# Altium PCB 滑板车模块-201119.PcbDoc
Units mm, origin at the board's own origin, x right, y up, seen from the top; angles counter-clockwise.
Board outline 16 x 13 mm, 2 copper layers (Top Layer, Bottom Layer); 21 components, 26 nets, 89 pads, 31 vias.
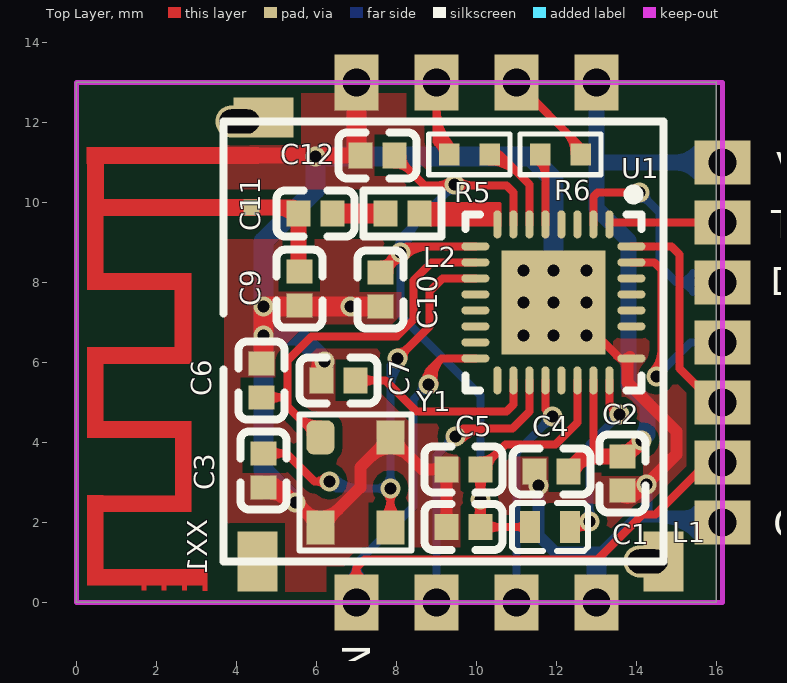
[diagram p0: Top Layer view]
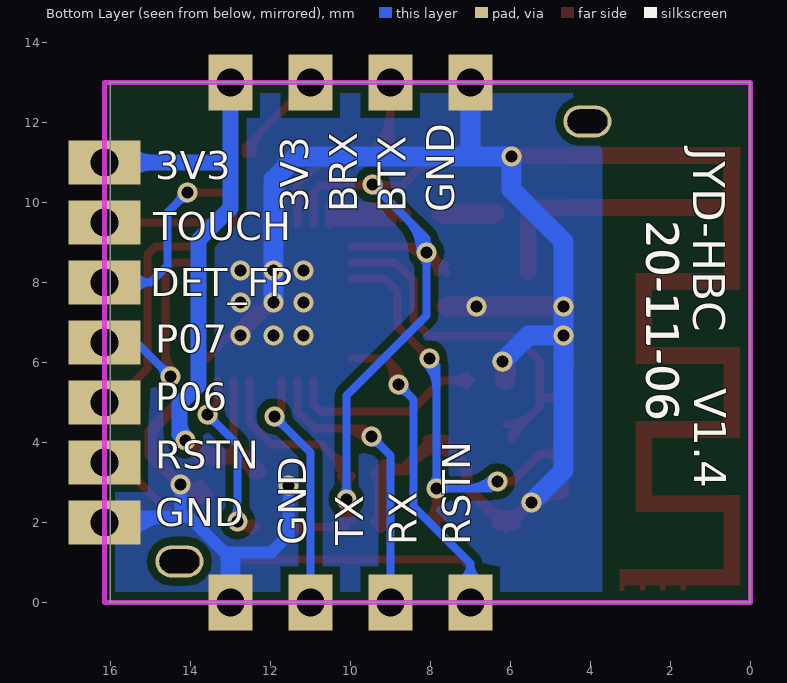
[diagram p1: Bottom Layer view, seen from below]
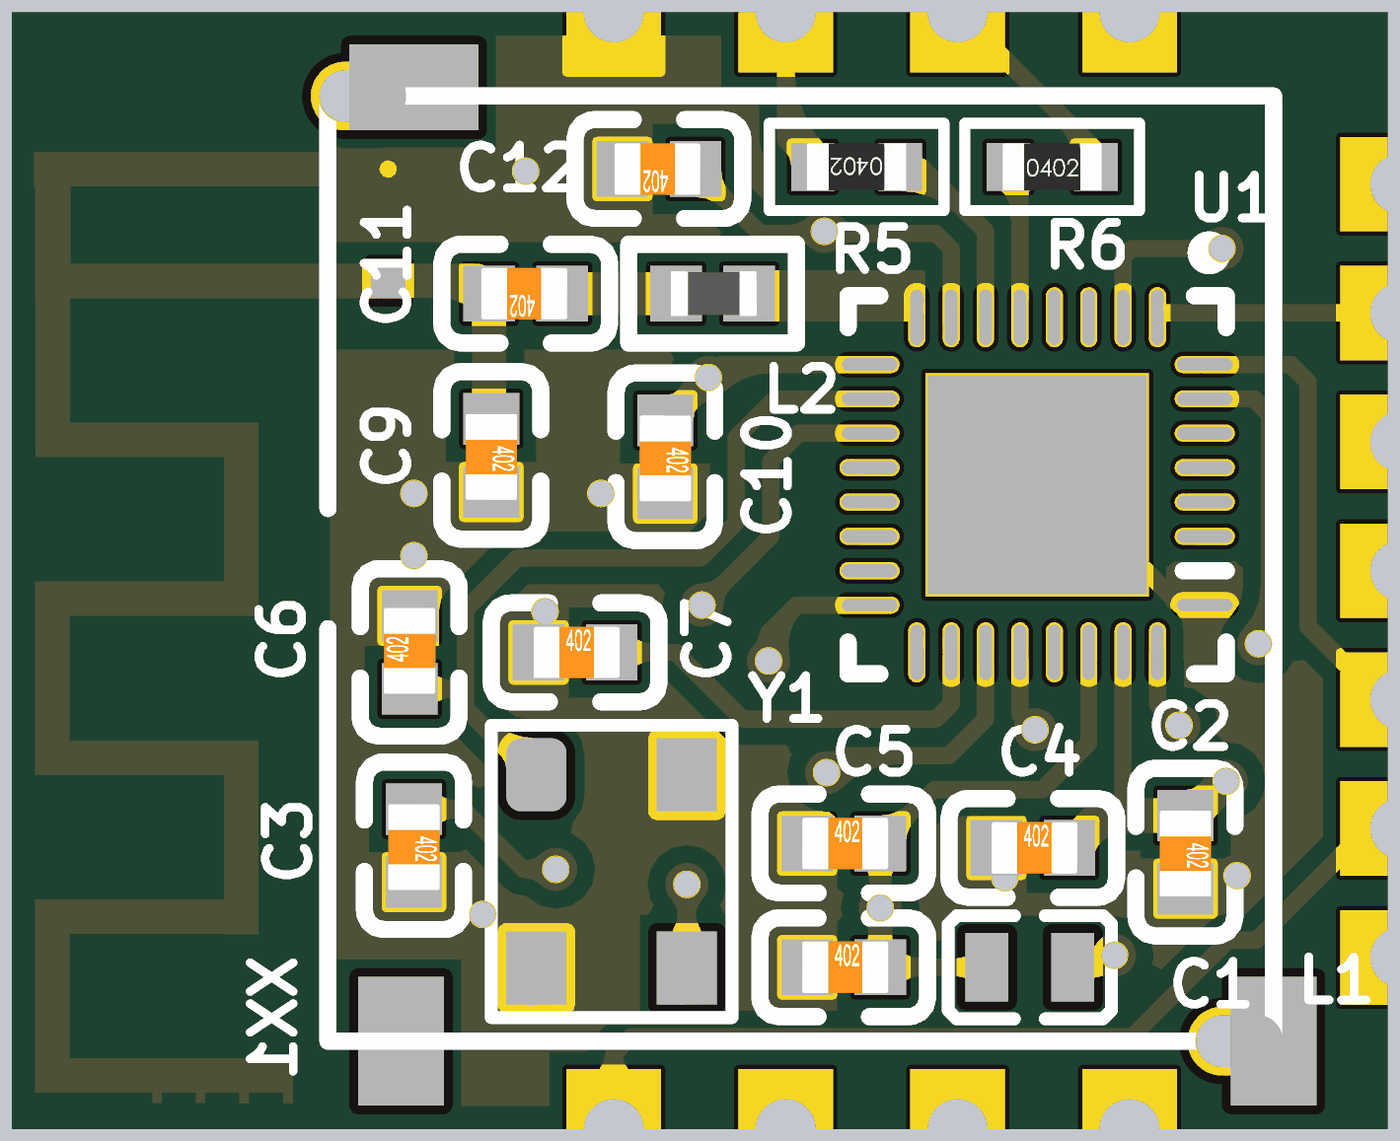
[diagram p2: 3D render of the assembled board from above, using the file's embedded part models]

## Layer stack, top to bottom
Top Layer: signal copper 0.0356
Dielectric: dielectric 0.32, FR-4, Dk 4.8
Bottom Layer: signal copper 0.0356

## Board outline
0,13 16,13 16,0 0,0

## Design rules (kind name [scope] priority, off if disabled: settings)
Clearance Clearance_2 [All] p1 off: gap=0.1
Clearance Clearance_1 [(IsWire)or(IsThruPin)or(IsFill)or(InPolygon) vs (InPolygon)] p2: gap=0
Clearance [All] p3 off: gap=0.2
ComponentClearance [All] p1: gap=0 collisioncheckmode=3 verticalgap=0 showdistances=FALSE
DiffPairsRouting [All] p1: maxlimit=2.032 minlimit=0.152 mostfreqgap=0.2 maxuncoupledlength=12.7
FabricationTestpoint [(IsPad And (OnTopLayer Or OnBottomLayer))] p1: side=3 testpointundercomponent=TRUE minsize=1.016 maxsize=2.54 preferedsize=1.524 minholesize=0 maxholesize=1.016 preferedholesize=0.813 testpointgrid=0.025 allowsidetop=TRUE allowsidebottom=TRUE usegrid=TRUE gridtolerance=0
HoleToHoleClearance [All] p1: gap=0 allowstackedmicrovias=TRUE
MinimumSolderMaskSliver [All] p1: minsoldermaskwidth=0
PolygonConnect PolygonConnect_1 [isvia] p1: connectstyle=Direct reliefconductorwidth=0.254 reliefentries=4 polygonreliefangle="90 Angle" airgapwidth=0.254
PolygonConnect [All] p2: connectstyle=Direct reliefconductorwidth=0.305 reliefentries=4 polygonreliefangle="90 Angle" airgapwidth=0.254
RoutingVias [All] p1: holewidth=0.3 width=0.5 viastyle="Through Hole" minholewidth=0.3 minwidth=0.5 maxholewidth=0.3 maxwidth=0.5
ShortCircuit [All] p1: allowed=TRUE
SilkToSilkClearance [All] p1: silktosilkclearance=0
SilkToSolderMaskClearance [IsPad] p1: minsilkscreentomaskgap=0 clearancetoexposedcopper=TRUE
SolderMaskExpansion [All] p1: expansion=0.102
Width [All] p1: maxlimit=2.032 minlimit=0.1 preferedwidth=0.2
20 further rules are at their usual default settings.

## Classes and differential pairs
component class "仪表-蓝牙-指纹 接线图": J2
component class 滑板车模块: C1 C2 C3 C4 C5 C6 C7 C9 C10 C11 C12 L1 L2 R5 R6 U1 XX1 Y1

## Components (designator, comment, footprint, x,y, rotation, side; value= is the part's Value field where it differs from the comment)
C1 "4.7uF/10V" LC-0402_C 9.675,1.885 r0 top
C2 "100nF" LC-0402_C 13.65,3.225 r270 top (schematic designator C17)
C3 "5.6pF" LC-0402_C 4.675,3.3 r270 top (schematic designator C12)
C4 "1uF/10V" LC-0402_C 11.875,3.275 r0 top (schematic designator C2)
C5 "1uF/6.3" LC-0402_C 9.675,3.325 r0 top (schematic designator C3)
C6 "5.6pF" LC-0402_C 4.625,5.55 r90 top (schematic designator C11)
C7 "100nF" LC-0402_C 6.55,5.55 r0 top
C9 "1.0pF" LC-0402_C 5.575,7.842 r270 top (schematic designator C8)
C10 "100nF" LC-0402_C 7.6,7.825 r270 top (schematic designator C9)
C11 "1pF" LC-0402_C 5.975,9.725 r180 top (schematic designator C6)
C12 "1uF/6.3V" LC-0402_C 7.525,11.175 r180 top (schematic designator C4)
J6 "7P" 7P-1.5MM 16.15,6.5 r270 bottom
L1 "2.2uH" L0402 11.84,1.885 r180 top
L2 "2nH" LC-0402_L 8.15,9.725 r0 top
P1 "Header 4" 4P-2.0MM 10,13 r180 top
P2 "Header 4" 4P-2.0MM 10,0 r180 top
R5 "20R" 0402R 9.825,11.2 r180 top
R6 "20R" 0402R 12.1,11.2 r0 top
U1 "BK3432" LC-VQFN-32_4x4x04P 11.925,7.5 r180 top
XX1 "TIANX" BT_NAMI_NO 4.375,9.875 r90 top
Y1 "16MHz" SMT-3225 6.975,3 r270 top

## Footprints (in the part's own frame and the unit in brackets; to place one, negate y for a bottom-side part, rotate by r counter-clockwise, add the part's x,y. Pads: shape width x height; smd on the part's side, far side on the other; paste and mask are expansions set on the pad)
4P-2.0MM [mm]
  rect 1.1x1.4 hole 0.7 mask+0.05: 1(-3,0) 2(-1,0) 3(1,0) 4(3,0)
7P-1.5MM [mm]
  rect 1.1x1.8 / inner rect 1.1x1.4 / far side rect 1.1x1.4 hole 0.7 mask+0.05: 1(-4.5,0) 2(-3,0) 3(-1.5,0) 4(0,0) 5(1.5,0) 6(3,0) 7(4.5,0)
0402R [mil]
  rect 20x22 smd mask+2: 1(-20,0) 2(20,0)
  silkscreen extent -40,-20 40,20, body extent -23,-11 23,11, height 16
BT_NAMI_NO [mm]
  rect 0.4x0.4 smd: 1(0,0)
  rect 0x0 smd: 2(1.3,0)
  Top Layer region: 1.5,-0.18 1.098,-0.18 1.098,4.116 1.5,4.116
  Top Layer region: 0.2,-0.197 -0.203,-0.197 -0.203,4.1 0.2,4.1
  Top Layer region: -2.05,3.703 -2.05,4.104 0.199,4.104 0.199,3.703
  Top Layer region: -1.651,1.512 -2.053,1.512 -2.053,4.101 -1.651,4.101
  Top Layer region: -0.208,3.695 -0.208,4.11 1.495,4.11 1.495,3.695
  Top Layer region: -3.899,1.51 -3.899,1.911 -1.65,1.911 -1.65,1.51
  Top Layer region: -3.5,1.512 -3.902,1.512 -3.902,4.101 -3.5,4.101
  Top Layer region: -5.751,3.704 -5.751,4.106 -3.502,4.106 -3.502,3.704
  Top Layer region: -7.609,1.506 -7.609,1.907 -5.359,1.907 -5.359,1.506
  Top Layer region: -5.35,1.51 -5.752,1.51 -5.752,4.103 -5.35,4.103
  Top Layer region: -7.202,1.51 -7.604,1.51 -7.604,4.106 -7.202,4.106
  Top Layer region: -9.45,3.704 -9.45,4.106 -7.201,4.106 -7.201,3.704
  Top Layer region: -9.048,1.106 -9.45,1.106 -9.45,4.108 -9.048,4.108
  Top Layer region: -9.574,1.732 -9.135,1.732 -9.135,1.619 -9.574,1.619
  Top Layer region: -9.573,2.239 -9.136,2.239 -9.136,2.126 -9.573,2.126
  Top Layer region: -9.571,2.745 -9.135,2.745 -9.135,2.632 -9.571,2.632
  Top Layer region: -9.578,1.22 -9.136,1.22 -9.136,1.107 -9.578,1.107
L0402 [mm]
  rect 0.5x0.8 smd: 1(-0.5,0) 2(0.5,0)
  silkscreen extent -0.95,-0.6 0.95,0.6
LC-0402_C [mm]
  rect 0.6x0.65 smd mask+0.051: 1(-0.425,0) 2(0.425,0)
  silkscreen extent -0.98,-0.58 0.97,0.58, body extent -0.48,-0.3 0.52,0.3, height 0.2
LC-0402_L [mm]
  rect 0.6x0.65 smd mask+0.051: 1(-0.425,0) 2(0.425,0)
  silkscreen extent -0.98,-0.58 0.97,0.58, body extent -0.51,-0.26 0.54,0.26, height 0.36
LC-VQFN-32_4x4x04P [mm]
  rect 2.6x2.6 smd paste-0.025 mask+0.051: 0(0,0)
  oval 0.2x0.7 smd paste-0.025 mask+0.051: 1(-1.4,-1.95) 2(-1,-1.95) 3(-0.6,-1.95) 4(-0.2,-1.95) 5(0.2,-1.95) 6(0.6,-1.95) 7(1,-1.95) 8(1.4,-1.95) 17(1.4,1.95) 18(1,1.95) 19(0.6,1.95) 20(0.2,1.95) 21(-0.2,1.95) 22(-0.6,1.95) 23(-1,1.95) 24(-1.4,1.95)
  oval 0.7x0.2 smd paste-0.025 mask+0.051: 9(1.95,-1.4) 10(1.95,-1) 11(1.95,-0.6) 12(1.95,-0.2) 13(1.95,0.2) 14(1.95,0.6) 15(1.95,1) 16(1.95,1.4) 25(-1.95,1.4) 27(-1.95,0.6) 28(-1.95,0.2) 29(-1.95,-0.2) 30(-1.95,-0.6) 31(-1.95,-1) 32(-1.95,-1.4)
  oval 0.7x0.2 on Top Overlay paste-0.025 mask+0.051: 26(-1.95,1)
  silkscreen extent -2.2,-2.82 2.2,2.2
SMT-3225 [mm]
  rrect50% 0.85x0.7 smd: 1(-1.125,-0.875)
  rect 0.85x0.7 smd: 2(1.125,-0.875) 3(1.125,0.875) 4(-1.125,0.875)
  silkscreen extent -1.7,-1.4 1.7,1.4

## Part data
C1 C3 C4 C5 C6 C7 C9 C10 C11 C12: library part CAP0603
C2: library part CAP-NP, "Capacitor, Ceramic"
L1 L2: "Power Inductor, 4.7uH, 0.7A, 260mR DCR"
P1 P2: "Header, 4-Pin"
R5 R6: library part Res1, "Resistor"
Y1: library part OSCILATOR_0

## Free pads (board coordinates)
  rect 1x1.5 smd: 0(4.525,1.025) 0(14.675,1.025)
  oval 1.2x0.8 hole 0.6 slot 1 at 0 deg: 1(4.075,12.025) 2(14.275,1.025)
  rect 1.5x1 smd: 1(4.675,12.125)

## Via types
v1: diameter 0.5, hole 0.3, Top Layer to Bottom Layer, tented both sides, 31 vias

## Nets (pads, with @x,y where several pads share a name; then routed paths per layer and width w, separated by ;. In a path a pad name is that pad's centre, name@x,y a point inside that pad or via, vN(x,y) a via of type N, cw(c..) or ccw(c..) an arc to the next point about the centre after c; other vN are vias at no path point)
3V3: 
BRX: 
DET_FP: 
GND: C1.1 C2.2 C3.2 C4.1 C5.1 C6.2 C7.1 C9.2 C10.2 C12.2 J6.7 P1.4 P2.1 U1.25 XX1.2 Y1.2 Y1.4 | length 72.2
  Top Layer w0.2: C7.1@6.034,5.753 ccw(c5.894,6.025) v1(6.2,6.025) 6.2,5.625 C7.1 ; v1@6.094,5.919 cw(c5.838,5.663) 6.2,5.663 cw(c6.562,5.663) v1@6.306,5.919 ; v1@6.2,5.877 ccw(c6.427,5.877) C7.1@6.266,5.716 ; v1(11.925,7.5) 12.075,7.35 12.341,7.35 13.591,6.1 13.775,6.1 U1.25
  Top Layer w0.3: C3.2 5.1,2.875 Y1.2 7.1,2.875 7.1,3.375 Y1.4 8.65,3.325 C5.1 C1.1 ; C3.2@4.7,2.725 cw(c4.7,1.397) v1@5.639,2.336 ; C3.2@4.7,3.025 cw(c4.7,2.421) 5.127,2.848 ; C3.2@4.806,2.769 cw(c5.062,2.513) 5.062,2.875 cw(c5.062,3.237) C3.2@4.806,2.981 ; 5.11,2.641 ccw(c5.334,3.028) v1@5.449,2.597 ; v1@5.572,2.526 ccw(c5.993,2.639) Y1.2@5.775,2.261 ; v1@5.631,2.344 ccw(c6.1,2.814) 6.1,2.15 ccw(c6.1,2.814) 6.569,2.344 ; Y1.2@5.812,2.163 cw(c5.598,1.95) Y1.2@5.9,1.95 ; Y1.2@6.3,1.95 cw(c6.602,1.95) Y1.2@6.388,2.163 ; 7.381,3.656 cw(c7.85,3.186) 7.85,3.85 cw(c7.85,3.186) 8.319,3.656 ; Y1.4@7.562,3.837 ccw(c7.348,4.05) Y1.4@7.65,4.05 ; Y1.4@8.05,4.05 ccw(c8.352,4.05) Y1.4@8.138,3.837 ; C1.1@9.144,2.016 ccw(c8.888,2.272) 9.25,2.272 ccw(c9.612,2.272) C1.1@9.356,2.016 ; C5.1@9.144,3.194 cw(c8.888,2.938) 9.25,2.938 cw(c9.612,2.938) C5.1@9.356,3.194 ; C5.1@9.144,3.219 ccw(c8.888,2.963) 8.888,3.325 ccw(c8.888,3.687) C5.1@9.144,3.431 ; v1@12.075,7.35 v1(12.75,6.675) ; C2.2@13.583,2.681 ccw(c13.781,2.937) 14.009,2.709 ; C2.2@13.767,2.919 ccw(c13.991,3.21) v1(14.251,2.95) ; 13.775,5.979 cw(c13.996,5.979) U1.25@13.84,6.135 ; U1.25@13.775,6.1 13.775,5.5 15,4.275 15,3.699 v1(14.251,2.95) ; C2.2@13.781,2.694 cw(c14.037,2.438) 14.037,2.8 cw(c14.037,3.162) C2.2@13.781,2.906 ; C2.2@13.831,2.745 ccw(c13.69,3.274) v1@14.164,3 ; C2.2@13.887,2.76 ccw(c13.779,3.163) v1@14.16,2.991 ; C2.2@13.901,2.646 ccw(c13.629,3.117) v1@14.154,2.976 ; C2.2@13.965,2.683 ccw(c13.775,3.012) v1@14.152,2.963 ; v1@14.18,3.021 cw(c13.65,3.546) C2.2 14.101,2.8 v1(14.251,2.95)
  Top Layer w0.4: XX1.2 C12.2
  Top Layer w0.5: C6.2 4.675,6.025 v1(4.675,6.675) v1(4.675,7.4) 6.15,7.4 C10.2 ; C7.1 6.125,5.95 v1(6.2,6.025) ccw(c6.431,5.794) C7.1@6.166,5.604 ; 7,11.562 ccw(c7.462,11.562) C12.2@7.135,11.235 ; P1.4 7,11.275 C12.2
  Bottom Layer w0.3: v1(11.55,2.925) 11.55,1.675 11.975,1.25 13.15,1.25 14.05,2.15 14.275,2.15 ; v1(14.251,2.95) 14.251,2.174 14.275,2.15 ; 14.472,2.15 cw(c14.472,0.672) J6.7@15.517,1.717 ; J6.7@15.517,2.283 cw(c15.196,2.604) 15.196,2.15 cw(c15.196,1.396) J6.7@15.729,1.929 ; J6.7 16,2.15 14.275,2.15
  Bottom Layer w0.5: v1(5.475,2.5) 4.675,3.3 v1(4.675,6.675) ; v1(6.2,6.025) 5.55,6.675 v1(4.675,6.675) ; 7,11.225 P1.4 ; v1(11.925,7.5) 11.925,10.575 11.35,11.15 v1(5.975,11.15) 5.975,10.325 4.675,9.025 v1(4.675,6.675) ; P2.1 13,1.1
  other v1: 11.175,6.675 11.925,6.675 6.85,7.4 11.175,7.5 12.75,7.5 11.175,8.3 11.925,8.3 12.75,8.3
M3V3: C2.1 C4.2 J6.1 P1.1 U1.23 | length 20.1
  Top Layer w0.2: 12.925,3.65 U1.23
  Top Layer w0.4: C4.2 12.675,3.65 12.925,3.65 ; C4.2@12.395,3.268 cw(c12.925,3.091) 12.925,3.65 ; C2.1@13.675,3.75 ccw(c13.675,4.112) C2.1@13.931,3.856 ; v1(14.125,4.05) 13.725,3.65 C2.1 12.925,3.65 ; C2.1@13.908,3.842 ccw(c13.726,4.157) 14.077,4.063 cw(c13.726,4.157) C2.1@13.908,3.842
  Bottom Layer w0.4: 13,11 J6.1 ; P1.1 13,9.85 13.8,9.05 13.8,5.425 14.275,4.95 14.275,4.2 v1(14.125,4.05) ; v1@14.09,4.085 ccw(c13.642,4.533) 14.275,4.533 ; J6.1@15.553,10.753 ccw(c14.955,10.155) 14.955,11 ccw(c14.955,11.845) J6.1@15.553,11.247
NetC3_1: C3.1 U1.11 Y1.3 | length 17.9
  Top Layer w0.2: C3.1 5.25,3.725 5.95,3.025 v1(6.325,3.025) ; C3.1@4.841,3.584 cw(c5.183,3.242) 5.183,3.725 cw(c5.183,4.208) C3.1@4.841,3.866 ; v1@6.219,2.919 ccw(c5.963,2.663) 5.963,3.025 ccw(c5.963,3.387) v1@6.219,3.131 ; Y1.3@7.673,2.127 ccw(c7.246,2.554) 7.85,2.554 ccw(c8.454,2.554) Y1.3@8.027,2.127 ; v1@7.744,2.744 cw(c7.488,2.488) 7.85,2.488 cw(c8.212,2.488) v1@7.956,2.744 ; Y1.3 v1(7.85,2.85) ; v1(8.025,6.1) 8.825,6.9 8.825,7.775 9.15,8.1 U1.11 ; v1@8.025,6.25 ccw(c8.025,6.612) 8.281,6.356 ccw(c8.537,6.1) v1@8.175,6.1
  Bottom Layer w0.2: v1@6.29,2.99 ccw(c6.627,3.327) 6.627,2.85 ; v1(6.325,3.025) 6.5,2.85 v1(7.85,2.85) 7.85,5.925 v1(8.025,6.1) ; v1@6.431,3.131 ccw(c7.11,3.81) 7.11,2.85 ; v1@7.744,2.744 ccw(c7.488,2.488) 7.488,2.85 ccw(c7.488,3.212) 7.744,2.956 ccw(c7.488,3.212) 7.85,3.212 ccw(c8.212,3.212) v1@7.956,2.956 ; 7.85,5.315 cw(c8.81,5.315) v1@8.131,5.994 ; 7.85,5.798 cw(c8.327,5.798) v1@7.99,6.135
NetC6_1: C6.1 U1.10 Y1.1 | length 10.9
  Top Layer w0.2: C6.1 5.275,5.125 ; C6.1@4.791,4.984 cw(c5.133,4.642) 5.133,5.125 cw(c5.133,5.608) C6.1@4.791,5.266 ; 5.46,4.715 ccw(c6.1,5.355) Y1.1@6.1,4.45 ; Y1.1@5.762,4.413 cw(c5.548,4.2) Y1.1@5.85,4.2 ; Y1.1@5.95,4.1 5.95,4.225 5.275,4.9 5.275,5.125 ; U1.10 8.875,8.5 8.425,8.05 8.425,7.066 8.009,6.65 5.875,6.65 5.275,6.05 5.275,5.125
NetC7_2: C7.2 U1.18 | length 5.7
  Top Layer w0.2: C7.2 7.725,5.55 8.5,4.775 10.75,4.775 10.925,4.95 U1.18 ; C7.2@7.116,5.409 cw(c7.458,5.067) 7.458,5.55 cw(c7.458,6.033) C7.2@7.116,5.691
NetC9_1: C9.1 C11.2 XX1.1 | length 3.2
  Top Layer w0.4: XX1.1 5.4,9.875 C11.2 5.55,8.275 C9.1@5.575,8.25 ; 5.007,9.875 cw(c5.007,9.207) C11.2@5.479,9.679
NetC11_1: C11.1 L2.1 | length 1.3
  Top Layer w0.5: C11.1 L2.1
NetL1_1: L1.1 U1.24 | length 7.1
  Top Layer w0.2: L1.1@12.45,1.783 cw(c12.685,1.564) v1@12.685,1.885 ; L1.1@12.45,1.987 ccw(c12.685,2.207) v1@12.685,1.885 ; v1@12.693,2.096 cw(c12.34,2.285) L1.1 v1@12.685,1.885 ; v1(12.825,2.025) v1@12.685,1.885 ; U1.24 13.325,4.95 ; v1@13.425,4.703 ccw(c13.083,4.708) 13.325,4.95 ; v1@13.572,4.85 cw(c13.567,5.192) 13.325,4.95 ; v1(13.575,4.7) 13.325,4.95
  Bottom Layer w0.2: v1@12.719,2.131 ccw(c12.463,2.387) 12.825,2.387 ccw(c13.187,2.387) v1@12.931,2.131 ; v1(12.825,2.025) 12.825,3.95 v1(13.575,4.7) ; v1@13.425,4.7 cw(c13.063,4.7) 13.319,4.444 cw(c13.575,4.188) v1@13.575,4.55
NetL2_2: L2.2 U1.8 | length 3.4
  Top Layer w0.2: L2.2 8.675,9.825 10.45,9.825 10.525,9.75 U1.8 ; L2.2@8.716,9.609 cw(c9.239,9.086) 9.239,9.825 ; L2.2@8.716,9.891 ccw(c8.877,10.052) 8.877,9.825 ; 10.223,9.825 cw(c10.223,9.398) U1.8@10.525,9.7
P03: U1.3
P04: J6.3 U1.2 | length 7.8
  Top Layer w0.2: U1.2 12.925,10.15 13.025,10.25 v1(14.075,10.25) ; v1@13.969,10.144 ccw(c13.713,9.888) 13.713,10.25 ccw(c13.713,10.612) v1@13.969,10.356
  Bottom Layer w0.2: v1@14.075,10.1 cw(c14.075,9.738) 14.331,9.994 cw(c14.587,10.25) v1@14.225,10.25 ; v1(14.075,10.25) 14.575,9.75 14.575,8.425 15,8 ; J6.3@15.415,7.766 ccw(c15,7.514) 15,8 ; J6.3@15.415,8.234 cw(c15,8.486) 15,8 ; J6.3 15,8
P05/TOUCH: J6.2 U1.1 | length 3
  Top Layer w0.2: 13.446,9.5 ccw(c13.446,9.329) U1.1 13.375,9.5 J6.2
P06: J6.5 U1.32 | length 5.6
  Top Layer w0.2: U1.32 14.875,8.9 15.075,8.7 15.075,5.85 15.925,5 J6.5
P07: J6.4 U1.31 | length 6.7
  Top Layer w0.2: U1.31 14.45,8.5 14.625,8.325 14.625,5.775 v1(14.5,5.65) ; v1@14.394,5.756 ccw(c13.836,6.314) 14.625,6.314
  Bottom Layer w0.2: v1(14.5,5.65) 15.35,6.5 J6.4 ; v1@14.5,5.8 ccw(c14.5,6.162) 14.756,5.906 ccw(c15.012,5.65) v1@14.65,5.65
RSTN: J6.6 P2.4 U1.16 | length 23
  Top Layer w0.2: P2.4@6.8,0.553 ccw(c6.641,0.875) 7,0.875 ; P2.4 7,0.875 ; P2.4@7.2,0.553 cw(c7.359,0.875) 7,0.875 ; v1@8.703,5.564 ccw(c8.523,5.775) 8.8,5.775 ; v1@8.751,5.439 cw(c9.177,5.535) 8.868,5.843 ; v1(8.8,5.45) 8.8,5.775 ; v1@8.897,5.564 cw(c9.077,5.775) 8.8,5.775 ; v1@8.946,5.483 cw(c9.596,5.629) 9.125,6.1 ; U1.16 9.125,6.1 ; J6.6 15.775,3.5 14.475,2.2 14.15,2.2 13.025,1.075 7.2,1.075 7,0.875 ; 8.8,5.775 9.125,6.1
  Bottom Layer w0.2: P2.4@6.756,0.528 ccw(c6.469,0.975) 7,0.975 ; P2.4 7,0.975 ; P2.4@7.244,0.528 cw(c7.531,0.975) 7,0.975 ; v1@8.65,5.45 cw(c8.288,5.45) 8.544,5.194 cw(c8.8,4.938) v1@8.8,5.3 ; v1(8.8,5.45) 8.425,5.075 8.425,2.4 7,0.975
RXD: R6.1 U1.5 | length 2.3
  Top Layer w0.2: R6.1@11.511,11.044 cw(c11.27,10.658) 11.725,10.658 ; R6.1 11.725,11.067 11.725,10.675 ; 11.7,10.65 11.725,10.675 ; U1.5 11.725,10.675
TOUCH: 
TXD: R5.1 U1.6 | length 3.5
  Top Layer w0.2: R5.1@10.333,11.021 cw(c10.333,10.003) 11.052,10.723 ; R5.1 10.575,11.2 11.325,10.45 U1.6 ; R5.1@10.333,11.221 cw(c10.333,10.686) 10.711,11.064
UART1_RXD: P1.2 R6.2 | length 3.1
  Top Layer w0.2: P1.2 12.608,11.392 R6.2 ; 12.227,11.773 cw(c11.68,11.225) R6.2@12.454,11.225
UART1_TXD: P1.3 R5.2 | length 4.4
  Top Layer w0.2: 9,11.88 ccw(c9.971,11.88) R5.2@9.284,11.193 ; P1.3@9,12.363 ccw(c10.454,12.363) R5.2@9.426,11.334 ; P1.3 9,11.517 R5.2 ; 9.011,11.506 ccw(c9.317,11.813) R5.2@9.317,11.379 ; R5.2@9.072,11.445 cw(c8.853,11.225) R5.2@9.163,11.225
UART2_RXD: P2.3 U1.19 | length 9.4
  Top Layer w0.2: v1@9.44,4.185 cw(c9.838,3.787) 9.838,4.35 ; v1(9.475,4.15) 9.675,4.35 ; v1@9.503,4.297 ccw(c9.539,4.486) 9.675,4.35 ; v1@9.581,4.044 cw(c10.32,3.305) 10.32,4.35 ; v1@9.622,4.178 cw(c9.811,4.214) 9.675,4.35 ; U1.19 11.325,4.775 10.9,4.35 9.675,4.35
  Bottom Layer w0.2: P2.3 9,3.675 v1(9.475,4.15) ; v1@9.325,4.15 cw(c8.963,4.15) 9.219,3.894 cw(c9.475,3.638) v1@9.475,4
UART2_TXD: P2.2 U1.20 | length 6.6
  Top Layer w0.2: U1.20 11.725,4.825 v1(11.9,4.65)
  Bottom Layer w0.2: P2.2 11,3.75 v1(11.9,4.65) ; v1@11.75,4.65 cw(c11.388,4.65) 11.644,4.394 cw(c11.9,4.138) v1@11.9,4.5
VD1V5: C1.2 C5.2 C10.1 C12.1 L1.2 U1.7 U1.9 U1.22 | length 37.9
  Top Layer w0.2: C10.1 v1(8.1,8.75) 8.25,8.9 U1.9 ; C10.1@7.625,8.45 ccw(c7.625,8.872) v1@7.924,8.574 ; C10.1@7.702,8.446 ccw(c7.436,8.907) v1@7.954,8.784 ; C10.1@7.825,8.25 cw(c8.368,8.25) v1@7.984,8.634 ; C10.1@7.831,8.369 cw(c8.269,8.117) v1@8.139,8.605 ; 7.933,8.546 ccw(c7.745,8.655) v1@7.955,8.711 ; v1@7.95,8.75 cw(c7.588,8.75) 7.844,8.494 cw(c8.1,8.238) v1@8.1,8.6 ; C12.1@7.95,10.95 cw(c7.95,10.407) 8.334,10.791 ; C12.1 8.7,10.425 10.75,10.425 10.925,10.25 U1.7 ; v1@8.065,8.785 cw(c8.341,8.509) 8.341,8.9 ; C12.1@8.15,11.15 ccw(c8.572,11.15) 8.274,10.851 ; v1@8.206,8.644 cw(c8.824,8.026) 8.824,8.9 ; 9.028,10.425 ccw(c9.028,10.872) v1@9.344,10.556 ; 9.148,10.425 cw(c9.148,10.148) v1@9.344,10.344 ; v1@9.556,10.344 cw(c9.752,10.148) 9.752,10.425 ; v1@9.556,10.556 ccw(c9.872,10.872) 9.872,10.425 ; C1.2@9.959,2.051 ccw(c9.617,2.393) 10.1,2.393 ccw(c10.583,2.393) C1.2@10.241,2.051 ; C5.2@9.959,3.159 cw(c9.617,2.817) 10.1,2.817 cw(c10.583,2.817) C5.2@10.241,3.159 ; v1@9.992,2.679 ccw(c9.786,2.879) 10.063,2.954 ; v1@9.994,2.469 cw(c9.738,2.213) 10.1,2.213 cw(c10.462,2.213) v1@10.206,2.469 ; v1@9.993,2.47 cw(c9.816,2.295) 10.056,2.23 ; v1@9.994,2.681 ccw(c9.738,2.937) 10.1,2.937 ccw(c10.462,2.937) v1@10.206,2.681 ; v1@10.025,2.445 cw(c9.924,2.271) 10.119,2.323 ; 10.081,2.323 cw(c10.276,2.271) v1@10.175,2.445 ; C5.2@10.1,3.55 ccw(c10.1,4.093) 10.484,3.709 ; 10.137,2.954 ccw(c10.414,2.879) v1@10.208,2.679 ; 10.144,2.23 cw(c10.384,2.295) v1@10.207,2.47 ; C1.2@10.241,1.744 cw(c10.583,1.402) 10.583,1.885 cw(c10.583,2.368) C1.2@10.241,2.026 ; C5.2@10.3,3.35 cw(c10.722,3.35) 10.424,3.649 ; L1.2@11.234,1.779 ccw(c10.978,1.523) 10.978,1.885 ccw(c10.978,2.247) L1.2@11.234,1.991 ; L1.2 C1.2 C5.2 10.725,3.95 11.978,3.95 12.525,4.497 U1.22
  Bottom Layer w0.2: v1@7.994,8.644 cw(c7.738,8.388) 8.1,8.388 cw(c8.462,8.388) v1@8.206,8.644 ; v1@7.997,8.859 ccw(c7.767,9.1) 8.1,9.1 ; v1@8.05,8.75 cw(c8.774,8.75) 8.262,9.262 ; v1@8.203,8.859 cw(c8.433,9.1) 8.1,9.1 ; v1@8.25,8.75 cw(c9.457,8.75) 8.604,9.604 ; v1@9.3,10.45 cw(c8.938,10.45) 9.194,10.194 cw(c9.45,9.938) v1@9.45,10.3 ; v1(9.45,10.45) 8.1,9.1 ; v1@9.994,2.681 ccw(c9.738,2.937) 10.1,2.937 ccw(c10.462,2.937) v1@10.206,2.681 ; v1(10.1,2.575) 10.1,5.175 8.1,7.175 v1(8.1,8.75) 8.1,9.1
pads on no net: U1.0 U1.4 U1.12 U1.13 U1.14 U1.15 U1.17 U1.21 U1.26 U1.27 U1.28 U1.29 U1.30

## Polygon pours and split planes (outlines as drawn)
GND on Bottom Layer "Top Layer-No Net" (solid, remove dead copper, pour order 12): 0,0 16.15,0 16.15,13 0,13
GND on Top Layer "Top Layer-No Net" (solid, remove dead copper, pour order 14): 0,13 0,0 16.15,0 16.15,13

## Keep-outs
Keep-Out Layer:
  lines w0.127: 0,0 16.15,0 16.15,13 0,13 0,0

## Other copper
Top Layer:
  pour cut-out: 0,13 3.7,13 3.7,-0.55 0,-0.55
  region net NetL2_2: 8.85,10 10.6,10 10.625,9.975 10.625,9.4 8.85,9.4
  pour cut-out: 3.7,10.325 3.7,9.075 10.725,9.075 10.725,9.875 10.275,10.325
Bottom Layer:
  pour cut-out: 0,13 3.7,13 3.7,-0.55 0,-0.55

## Silkscreen, mask and mechanical layers (free items; w line width, h text height)
Top Overlay:
  lines w0.2: 3.675,5.825 3.675,1.025 14.675,1.025 14.675,12.025 3.675,12.025 3.675,7.225
  text "GND" at 7.375,14.625 h0.7 r90
  text "BTX" at 9.35,14.625 h0.7 r90
  text "3V3" at 13.35,14.625 h0.7 r90
  text "BRX" at 11.375,14.6 h0.7 r90
  text "VD3V3" at 17.5,10.55 h0.7
  text "TOUCH" at 17.375,9.1 h0.7
  text "DET_FP" at 17.35,7.675 h0.7
  text "GND" at 17.425,1.625 h0.7
  text "RSTN" at 7.35,-3.65 h0.7 r90
  text "RX" at 9.35,-3.7 h0.7 r90
  text "TX" at 11.35,-3.7 h0.7 r90
  text "GND" at 13.35,-3.75 h0.7 r90
Bottom Overlay:
  text "JYD-HBC" at 1.425,11.35 h0.8 r90
  text "3V3" at 14.875,10.575 h0.7
  text "GND" at 7.4,9.75 h0.7 r270
  text "BTX" at 8.617,9.75 h0.7 r270
  text "BRX" at 9.833,9.75 h0.7 r270
  text "3V3" at 11.05,9.75 h0.7 r270
  text "20-11-06" at 2.6,9.55 h0.8 r90
  text "20-11-06" at 2.575,9.525 h0.8 r90
  text "TOUCH" at 14.925,9.05 h0.7
  text "DET_FP" at 15,7.65 h0.7
  text "P07" at 14.875,6.237 h0.7
  text "V1.4" at 1.4,5.35 h0.8 r90
  text "P06" at 14.875,4.792 h0.7
  text "RSTN" at 14.875,3.346 h0.7
  text "GND" at 14.875,1.9 h0.7
  text "RSTN" at 7,1.425 h0.7 r270
  text "RX" at 8.342,1.425 h0.7 r270
  text "TX" at 9.675,1.425 h0.7 r270
  text "GND" at 11.1,1.425 h0.7 r270

## Dimensions
0,13 to 0,0 on Keep-Out Layer
0,0 to 16.15,0 on Keep-Out Layer